# Altium PCB Resolver_PCB.PcbDoc (part 2 of 2)
Units mm, origin at the board's own origin, x right, y up, seen from the top; angles counter-clockwise.
Board outline 113.4 x 54.46 mm, 2 copper layers (Top Layer, Bottom Layer); 126 components, 86 nets, 363 pads, 149 vias.
Unrouted connection lines stored in the file: 1.
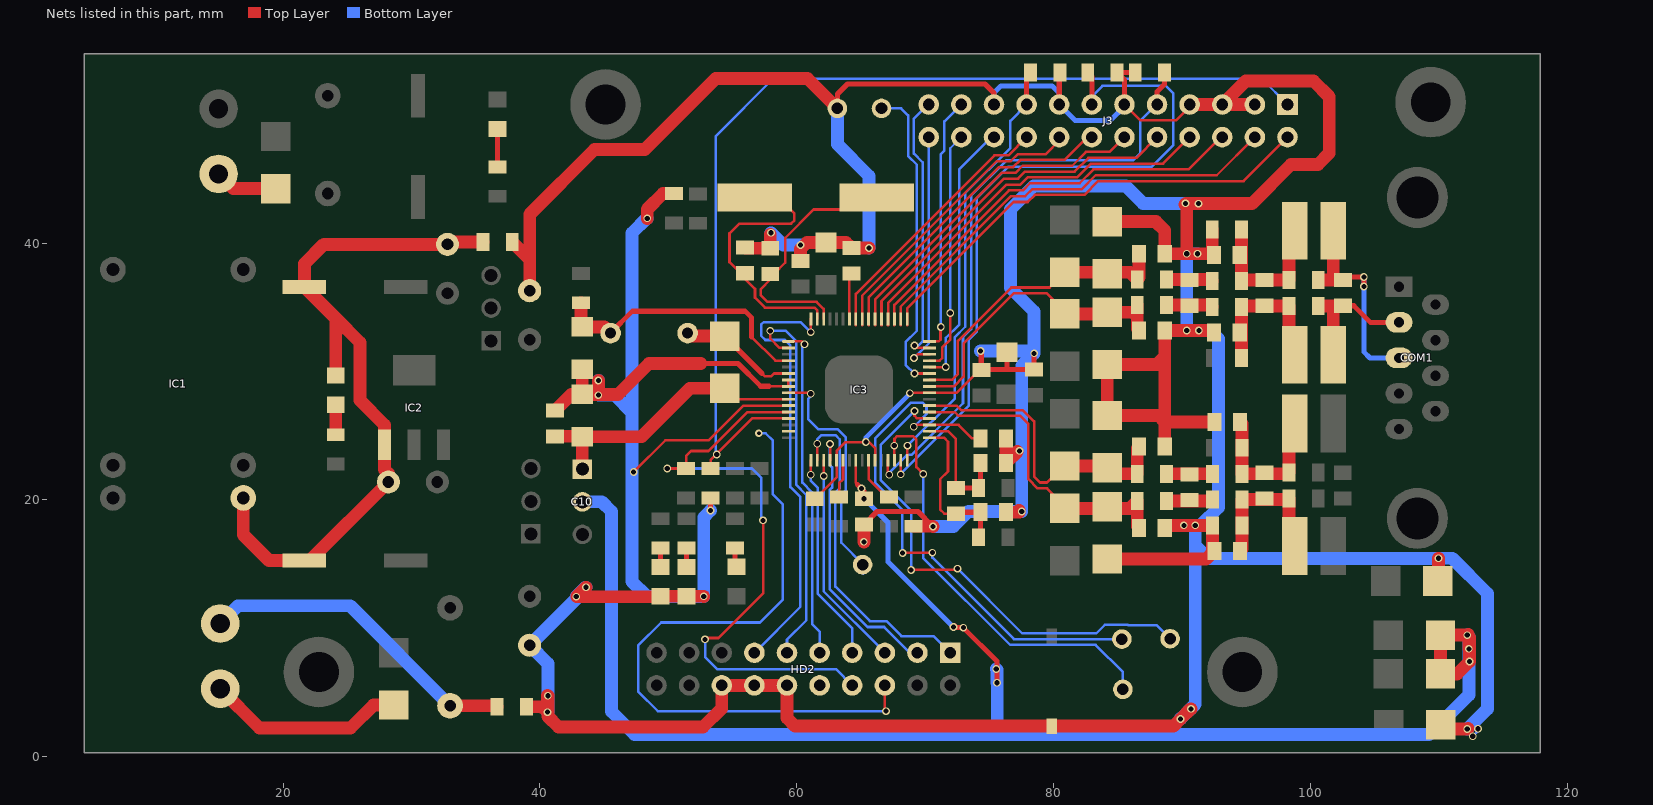
[diagram p2: the nets of this part, all layers, seen from the top]

## Via types
v1: diameter 0.6, hole 0.4, Top Layer to Bottom Layer, 106 vias
v2: diameter 0.4, hole 0.4, Top Layer to Bottom Layer, 32 vias
v3: diameter 0.6, hole 0.6, Top Layer to Bottom Layer, 9 vias
v4: diameter 0.6, hole 0.3, Top Layer to Bottom Layer, 2 vias

## Nets (pads, with @x,y where several pads share a name; then routed paths per layer and width w, separated by ;. In a path a pad name is that pad's centre, name@x,y a point inside that pad or via, vN(x,y) a via of type N, cw(c..) or ccw(c..) an arc to the next point about the centre after c; other vN are vias at no path point) (continued)
GND_DSP: C8.1 C9.1 Cx1.1 Cx2.1 Cx3.1 Cx4.1 Cx5.1 Cx6.1 Cx7.1 Cx8.2 Cx9.1 Cx10.1 Cx12.2 Cx13.1 Cx14.1 Cx15.1 Cx16.1 Cx20.1 Cx21.1 Cx22.2 Cx23.1 Cx24.1 Cx25.1 Cx29.1 Cx30.1 Cx31.2 DIO3.1 DIO4.1 DIO7.1 DIO8.1 DIO11.1 DIO12.1 HD2.12 HD2.14 HD2.16 IC3.7 IC3.8 IC3.11 IC3.21 IC3.27 IC3.40 J3.3 J3.5 J3.7 J3.11 J3.15 J3.19 LED3.2 LED4.2 R3.2 R4.2 R24.2 R25.2 R26.2 R27.2 R28.2 R29.2 R30.2 R38.2 SW1.2 TP2.1 | length 546.9
  Top Layer w0.2: v1(47.295,22.174) 49.759,24.638 53.144,24.638 55.856,27.35 IC3.11@59.35,27.35 ; 57.836,28.854 57.84,28.85 IC3.8@59.35,28.85 IC3.7@59.35,29.35 IC3.7@59.337,29.337 ; Cx1.1@61.4,20.1 61.444,20.1 63.1,21.756 IC3.21@63.1,22.6 ; IC3.21@63.1,23.1 63.1,23.832 63.779,24.511 v1(65.38,24.511) 65.634,24.511 66.1,24.045 IC3.27@66.1,23.1 ; v1(68.809,28.321) 68.838,28.35 IC3.40@70.35,28.35 72.444,28.35 74.228,30.134 Cx4.1@74.371,30.134 ; J3.11@85.52,50.8 86.739,49.581 89.56,49.581 90.6,50.62 J3.7@90.6,50.8
  Top Layer w0.4: 52.527,30.632 55.423,30.632 57.201,28.854 57.836,28.854 ; v1(53.289,19.176) R28.2@53.289,20.155 ; Cx23.1@55.982,39.659 Cx23.1@56.033,39.608 ; v1@57.938,40.767 v1(57.988,40.818) ; 60.3,39.548 v1(60.3,39.853) ; TP2.1@63.17,50.495 63.17,51.613 63.957,52.4 74.651,52.4 75.36,51.691 J3.19@75.36,50.8 ; Cx8.2@64.119,39.776 Cx8.2@64.262,39.634 ; v1(65.227,16.739) 65.227,18.078 Cx9.1@65.25,18.1 66.25,19.101 69.444,19.101 v1@70.587,17.957 ; v1@65.624,39.634 v1(65.634,39.624) ; v1(74.32,31.598) 74.371,31.547 Cx4.1@74.371,30.134 74.393,30.155 76.276,30.155 ; Cx3.1@76.378,31.521 76.378,30.257 76.276,30.155 ; v1@77.318,23.8 v1(77.343,23.825) ; v1@77.471,19.051 v1(77.521,19.101) ; v1(78.486,31.42) 78.488,31.418 Cx2.1@78.488,30.155 76.276,30.155 ; J3.15@80.44,50.8 80.44,53.24 R26.2@80.5,53.3 ; J3.11@85.52,50.8 85.52,52.723 R27.2@84.943,53.3 R29.2@86.357,53.3
  Top Layer w1: R3.2@37.843,40.1 39.2,38.743 ; R4.2@38.943,3.9 40.169,3.9 v1(40.589,3.48) v1@40.589,4.775 ; C9.1@39.2,36.3 39.2,38.743 ; v1(40.615,4.75) 40.615,3.15 41.453,2.311 52.705,2.311 54.16,3.766 HD2.16@54.16,5.56 HD2.14@56.7,5.56 HD2.12@59.24,5.56 59.24,3.015 59.868,2.388 SW1.2@79.852,2.388 ; Cx6.1@41.174,26.959 42.44,28.226 Cx7.1@43.3,28.226 ; Cx5.1@43.3,30.174 Cx7.1@43.3,28.226 ; v1(43.586,13.208) 42.871,12.493 42.897,12.467 49.367,12.467 LED3.2@49.4,12.5 LED4.2@51.4,12.5 52.753,12.5 v1(52.756,12.497) ; v1(44.552,29.312) 44.552,28.251 v1@44.526,28.226 ; v1(48.362,41.935) 48.362,42.647 49.581,43.866 R30.2@50.444,43.866 ; 52.527,30.632 48.489,30.632 46.082,28.226 v1@44.526,28.226 ; Cx23.1@56.033,39.608 Cx24.1@57.938,39.608 v1@57.938,40.675 ; Cx14.1@60.3,38.624 60.3,39.548 60.808,40.056 Cx13.1@62.281,40.056 63.84,40.056 Cx8.2@64.119,39.776 ; TP2.1@63.17,50.495 60.833,52.832 53.696,52.832 48.16,47.296 44.248,47.296 39.2,42.248 39.2,38.743 ; Cx8.2@64.262,39.634 64.271,39.624 v1(65.634,39.624) ; v1(65.227,16.739) 65.25,16.761 Cx9.1@65.25,18.1 ; R24.2@69.1,17.957 70.587,17.957 v1(70.612,17.932) ; Cx12.2@76.3,19.051 77.321,19.051 v1@77.321,19.2 ; Cx16.1@76.3,24.8 Cx10.1@76.3,22.875 77.178,23.753 v1@77.178,23.8 ; SW1.2@79.858,2.393 SW1.2@79.852,2.388 ; DIO7.1@84.182,15.409 91.885,15.409 Cx21.1@92.52,16.044 92.377,16.187 R25.2@92.377,18.025 v1(91.034,18.025) v1(90.145,18.025) 88.865,18.025 Cx20.1@88.662,17.822 ; DIO12.1@84.182,41.677 87.965,41.677 88.662,40.98 Cx30.1@88.662,39.177 v1(90.373,39.177) ; Cx22.2@88.662,24.172 88.662,26.095 ; J3.7@90.6,50.8 J3.5@93.14,50.8 ; v1(90.703,3.734) 90.678,3.734 v1(89.891,2.946) 89.332,2.388 SW1.2@79.852,2.388 ; R38.2@92.361,41.082 Cx29.1@92.361,39.239 ; Cx25.1@92.504,33.061 92.357,33.208 v1(91.313,33.208) v1(90.373,33.208) Cx31.2@88.662,33.208 88.662,31.182 ; Cx29.1@92.504,39.096 Cx29.1@92.423,39.177 ; Cx15.1@92.52,26.077 88.681,26.077 88.662,26.095 ; J3.3@95.68,50.8 J3.5@93.14,50.8 ; DIO4.1@109.931,13.691 109.982,13.741 v1(109.982,15.469) ; DIO3.1@110.084,2.159 v1(112.217,2.159) v1@112.268,2.21 ; Cx7.1@43.3,28.226 v1@44.526,28.226 ; 88.662,26.095 88.662,31.182 ; 88.662,26.095 88.173,26.585 DIO8.1@84.182,26.585 DIO11.1@84.182,30.557 88.037,30.557 88.662,31.182 ; v1(90.373,39.177) 90.373,42.875 90.246,43.002 90.322,43.078 v1(91.288,43.078) 95.453,43.078 98.501,46.126 100.584,46.126 101.473,47.015 101.473,51.41 100.254,52.629 94.969,52.629 J3.5@93.14,50.8 ; v1(90.373,39.177) v1(91.211,39.177) Cx29.1@92.299,39.177 ; Cx29.1@92.299,39.177 Cx29.1@92.361,39.239 ; Cx29.1@92.299,39.177 Cx29.1@92.423,39.177 ; Cx29.1@92.361,39.239 Cx29.1@92.423,39.177
  Bottom Layer w0.2: v1(112.217,2.159) 113.03,2.159 v1(113.055,2.184) 113.055,2.007 v1(112.649,1.6)
  Bottom Layer w0.4: v1(65.38,24.511) 65.38,24.848 68.809,28.277 v1(68.809,28.321) ; J3.19@75.36,50.8 75.36,51.713 75.9,52.253 79.883,52.253 80.44,51.696 J3.15@80.44,50.8 81.685,49.555 82.451,49.555 82.461,49.546 84.42,49.546 85.52,50.646 J3.11@85.52,50.8 ; v1(77.343,23.825) v1@77.521,23.647
  Bottom Layer w1: v1(40.589,3.48) 40.615,3.505 v1(40.615,4.75) 40.615,7.275 C8.1@39.2,8.69 42.824,12.314 v1(42.824,12.471) 43.561,13.208 v1(43.586,13.208) ; v1(44.552,29.312) v1(44.552,28.169) 45.796,28.169 47.168,26.797 ; v1(48.362,41.935) 48.311,41.935 47.168,40.792 47.168,26.797 ; v1(53.289,19.176) 52.756,18.644 v1(52.756,12.497) 48.311,12.497 47.168,13.64 47.168,26.797 ; v1(57.988,40.818) 58.953,39.853 v1(60.3,39.853) ; TP2.1@63.17,50.495 63.17,47.701 65.634,45.237 v1(65.634,39.624) ; v1@70.704,17.932 72.212,17.932 73.381,19.101 v1(77.521,19.101) 77.521,23.647 77.521,30.455 v1(78.486,31.42) ; v1(74.32,31.598) 78.308,31.598 v1(78.486,31.42) ; v1@89.891,2.981 89.925,2.981 91.034,4.089 91.034,16.434 ; v1(90.145,18.025) v1(91.034,18.025) ; v1(91.211,39.177) v1(90.373,39.177) v1(90.373,33.208) v1(91.313,33.208) 92.192,33.208 92.837,32.563 92.837,19.406 91.456,18.025 v1(91.034,18.025) ; v1(91.288,43.078) 91.262,43.104 v1(90.272,43.104) 86.97,43.104 85.623,44.45 78.461,44.45 76.657,42.647 76.657,36.5 78.486,34.671 v1(78.486,31.42) ; v1(112.217,2.159) 113.792,3.734 113.792,12.725 111.049,15.469 v1(109.982,15.469) 109.95,15.437 92.03,15.437 91.034,16.434 ; 91.034,16.434 v1(91.034,18.025)
GND_EXC_EXT: C7.1 HD3.1 R4.1 | length 25.4
  Top Layer w1: C7.1@33,3.98 36.577,3.98 R4.1@36.657,3.9
  Bottom Layer w1: HD3.1@15.1,10.38 16.48,11.76 25.22,11.76 C7.1@33,3.98
GND_ISO: C1.2 C2.1 C5.2 C6.1 IC1.9 IC2.1 LED2.2 R3.1 | length 56.3
  Top Layer w1: IC1.9@16.9,20.16 16.9,17.288 18.888,15.3 C5.2@21.65,15.3 22.1,15.3 C6.1@28.2,21.4 28.2,22.067 27.9,22.367 IC2.1@27.9,24.3 27.9,25.846 25.984,27.762 25.984,32.266 24.1,34.15 ; LED2.2@24.1,29.7 24.1,34.15 ; R3.1@35.557,40.1 32.99,40.1 C2.1@32.8,39.91 23.171,39.91 21.666,38.405 21.666,36.616 C1.2@21.65,36.6 24.1,34.15
IE1: Cx10.2 Cx11.2 IC3.34 R11.2 | length 9.9
  Top Layer w0.2: IC3.34@70.35,25.35 71.805,25.35 72.39,24.765 Cx11.2@72.39,20.93 ; R11.2@74.137,20.93 R11.2@74.157,20.95 R11.2@74.3,21.093
  Top Layer w0.4: Cx11.2@72.39,20.93 R11.2@74.137,20.93 ; R11.2@74.3,21.093 Cx10.2@74.3,22.875
IE2: Cx11.1 Cx12.1 IC3.33 R13.2 | length 12.6
  Top Layer w0.2: IC3.33@70.35,24.85 71.467,24.85 71.78,24.536 71.78,22.225 71.171,21.615 71.171,19.253 71.494,18.93 Cx11.1@72.39,18.93 ; R13.2@74.157,17.1 R13.2@74.3,17.243 ; Cx12.1@74.179,18.93 Cx12.1@74.3,19.051
  Top Layer w0.4: Cx11.1@72.39,18.93 72.511,19.051 Cx12.1@74.3,19.051 R13.2@74.3,17.243
INBH: IC3.13 J3.1 R28.1 | length 80.2
  Top Layer w0.2: R28.1@53.289,22.441 53.289,23.113 v1@53.721,23.546 ; v1(53.772,23.546) v1@53.721,23.546 ; IC3.13@59.35,26.35 56.525,26.35 v1@53.721,23.546
  Bottom Layer w0.2: v1(53.772,23.546) 53.696,23.622 53.696,48.336 58.166,52.807 96.213,52.807 J3.1@98.22,50.8
IZ1: Cx22.1 DIO5.1 DIO8.2 IC3.38 R17.2 | length 24.1
  Top Layer w0.2: IC3.38@70.35,27.35 72.447,27.35 72.796,27 77.597,27 78.486,26.111 78.486,21.819 78.943,21.361 79.477,21.361 80.763,22.648 DIO5.1@80.88,22.648
  Top Layer w1: DIO5.1@80.88,22.648 84.055,22.648 DIO8.2@84.182,22.521 84.665,22.038 R17.2@86.519,22.038 86.519,24.029 Cx22.1@86.662,24.172
IZ2: Cx31.1 DIO9.1 DIO11.2 IC3.41 R32.2 | length 23.7
  Top Layer w0.2: IC3.41@70.35,28.85 72.233,28.85 73,29.616 73,32.2 76.896,36.097 79.473,36.097 80.88,34.69 DIO9.1@80.88,34.494
  Top Layer w1: DIO9.1@80.88,34.494 84.055,34.494 DIO11.2@84.182,34.621 86.214,34.621 86.519,34.315 ; R32.2@86.519,35.18 86.519,34.315 ; Cx31.1@86.662,33.208 86.519,33.351 86.519,34.315
IZ3: Cx20.2 DIO6.1 DIO7.2 IC3.37 R21.2 | length 24.3
  Top Layer w0.2: IC3.37@70.35,26.85 72.305,26.85 72.608,26.546 77.409,26.546 78.032,25.923 78.032,21.631 78.755,20.907 79.499,20.907 80.88,19.526 DIO6.1@80.88,19.346
  Top Layer w1: DIO6.1@80.88,19.346 85.935,19.346 R21.2@86.519,19.93 86.519,17.964 Cx20.2@86.662,17.822
IZ4: Cx30.2 DIO10.1 DIO12.2 IC3.42 R35.2 | length 23.4
  Top Layer w0.2: IC3.42@70.35,29.35 72.091,29.35 72.546,29.804 72.546,32.388 76.708,36.551 79.691,36.551 DIO10.1@80.88,37.74
  Top Layer w1: DIO10.1@80.88,37.74 85.958,37.74 R35.2@86.519,37.179 86.662,37.321 Cx30.2@86.662,39.177
NC: HD2.10
NCS: HD2.7 IC3.17 | length 16.3
  Top Layer w0.2: v1(61.087,21.971) 61.1,21.984 IC3.17@61.1,23.1
  Bottom Layer w0.2: v1(61.087,21.971) 61.087,21.514 61.649,20.952 61.649,12.69 64.32,10.019 HD2.7@64.32,8.1
NetC10_1: C10.1 Cx6.2 Cx7.2 IC3.10 SS1.2 | length 22.6
  Top Layer w0.2: SS1.2@54.381,28.702 55.233,27.85 IC3.10@59.35,27.85
  Top Layer w1: Cx6.2@41.174,24.959 43.265,24.959 Cx7.2@43.3,24.924 ; C10.1@43.3,22.4 Cx7.2@43.3,24.924 ; SS1.2@54.381,28.702 51.689,28.702 47.911,24.924 Cx7.2@43.3,24.924
NetCx5_2: Cx5.2 IC3.4 L1.1 R8.2 | length 21.3
  Top Layer w0.2: 56.49,32.7 58.34,30.85 IC3.4@59.35,30.85
  Top Layer w0.4: L1.1@45.5,33 47.196,34.696 55.982,34.696 56.49,34.188 56.49,32.7
  Top Layer w1: R8.2@43.2,35.357 43.2,33.576 Cx5.2@43.3,33.476 45.024,33.476 L1.1@45.5,33
NetCx8_1: Cx8.1 IC3.58 | length 3.6
  Top Layer w0.2: IC3.58@64.1,34.1 64.1,37.472 Cx8.1@64.262,37.634
NetCx15_2: Cx15.2 Cx18.2 L2.1 R16.2 R18.1 R19.2 | length 11.8
  Top Layer w1: Cx15.2@94.52,26.077 94.663,25.934 R18.1@94.663,22.038 98.228,22.038 R19.2@98.33,22.14 98.33,25.494 L2.1@98.786,25.95
NetCx16_2: Cx16.2 IC3.35 TP1.1 | length 42.8
  Top Layer w0.2: v1(68.25,15.875) 70.536,15.875 v1(70.561,15.9) ; v1(69.113,25.705) 69.259,25.85 IC3.35@70.35,25.85 72.6,25.85 73.651,24.8 Cx16.2@74.3,24.8
  Bottom Layer w0.2: v1(68.25,15.875) 68.205,15.919 68.205,19.243 66.1,21.348 66.1,24.785 68.893,27.578 69.806,27.578 70.104,27.28 70.104,26.695 v1(69.113,25.705) ; v1(70.561,15.9) 70.561,15.519 76.911,9.169 TP1.1@85.319,9.169
NetCx17_1: Cx17.1 R21.1 R22.2 | length 3.6
  Top Layer w1: R21.1@88.805,19.93 92.275,19.93 R22.2@92.377,20.031
NetCx17_2: Cx17.2 R17.1 R18.2 | length 3.6
  Top Layer w1: R17.1@88.805,22.038 R18.2@92.377,22.038
NetCx18_1: Cx18.1 Cx21.2 L3.1 R22.1 R23.2 R25.1 | length 11.6
  Top Layer w1: Cx21.2@94.52,16.044 94.663,16.187 R25.1@94.663,18.025 R22.1@94.663,20.031 98.254,20.031 R23.2@98.33,20.108 98.33,16.88 L3.1@98.786,16.425
NetCx23_2: Cx23.2 IC3.63 X1.1 | length 21.6
  Top Layer w0.2: X1.1@56.743,43.561 58.572,43.561 59.817,42.316 59.817,41.783 59.563,41.529 55.524,41.529 54.762,40.767 54.762,38.532 55.636,37.659 Cx23.2@55.982,37.659 55.982,37.211 56.747,36.446 56.747,35.753 57.524,34.976 61.366,34.976 61.6,34.742 IC3.63@61.6,34.1
NetCx24_2: Cx24.2 IC3.62 X1.2 | length 20
  Top Layer w0.2: IC3.62@62.1,34.1 62.1,34.884 61.554,35.43 57.712,35.43 57.201,35.941 57.201,36.424 57.938,37.16 Cx24.2@57.938,37.608 58.233,37.608 59.106,38.481 59.106,40.411 61.316,42.621 63.424,42.621 64.364,43.561 X1.2@66.243,43.561
NetCx25_2: Cx25.2 Cx27.2 L4.1 R31.2 R33.1 R34.2 | length 11.7
  Top Layer w1: R31.2@94.647,31.049 R33.1@94.647,35.047 94.713,35.113 R34.2@98.33,35.113 98.33,31.774 L4.1@98.786,31.319
NetCx26_1: Cx26.1 R35.1 R36.2 | length 3.6
  Top Layer w1: R35.1@88.805,37.179 92.241,37.179 R36.2@92.361,37.058
NetCx26_2: Cx26.2 R32.1 R33.2 | length 3.6
  Top Layer w1: R32.1@88.805,35.18 92.227,35.18 R33.2@92.361,35.047
NetCx27_1: Cx27.1 Cx29.2 L5.1 R36.1 R37.2 R38.1 | length 11.8
  Top Layer w1: R38.1@94.647,41.082 R36.1@94.647,37.058 94.717,37.129 Cx27.1@96.425,37.129 98.314,37.129 R37.2@98.33,37.145 98.33,40.515 L5.1@98.786,40.971
NetD1_1: D1.1 HD1.2 | length 4.9
  Top Layer w1: HD1.2@14.975,45.393 16.118,44.25 D1.1@19.41,44.25
NetD2_1: D2.1 HD3.2 | length 15.5
  Top Layer w1: HD3.2@15.1,5.3 18.165,2.235 25.248,2.235 27.048,4.036 D2.1@28.6,4.036
NetIC3_6: IC3.6 L1.2 SS1.1 | length 9.3
  Top Layer w0.2: 57.297,29.85 57.506,29.642 58.024,29.642 58.232,29.85 IC3.6@59.35,29.85
  Top Layer w0.4: SS1.1@54.381,32.766 57.297,29.85
  Top Layer w1: L1.2@51.5,33 51.734,32.766 SS1.1@54.381,32.766
NetIC3_9: IC3.9 TP3.1 | length 18.8
  Top Layer w0.2: IC3.9@59.35,28.35 61.007,28.35 v1(61.087,28.27)
  Bottom Layer w0.2: v1(61.087,28.27) 61.087,28.064 60.887,27.864 60.887,26.311 61.7,25.498 63.205,25.498 63.802,24.902 63.802,20.734 63.465,20.398 63.465,16.672 65.176,14.961 TP3.1@65.176,14.275
NetIC3_30: IC3.30 TP4.1 | length 33.6
  Top Layer w0.2: v1(67.589,24.232) v1@67.6,24.221 ; IC3.30@67.6,23.1 v1@67.6,24.221 ; v1(69.85,22.022) 69.317,22.555 69.317,24.714 69.063,24.968 67.818,24.968 67.615,24.765 67.615,24.236 v1@67.6,24.221
  Bottom Layer w0.2: v1(69.85,22.022) 69.85,15.494 76.629,8.715 83.283,8.715 85.395,6.604 TP4.1@85.395,5.258
NetIC3_36: IC3.36 TP5.1 | length 39.1
  Top Layer w0.2: v1(68.91,14.554) 72.415,14.554 v1(72.517,14.656) ; v1(69.164,26.924) 69.164,26.568 69.374,26.359 70.341,26.359 IC3.36@70.35,26.35
  Bottom Layer w0.2: v1(68.91,14.554) 68.904,14.561 68.904,19.187 66.554,21.536 66.554,24.314 v1(69.164,26.924) ; v1(72.517,14.656) 77.549,9.623 83.337,9.623 83.999,10.285 85.781,10.285 85.805,10.262 88.011,10.262 TP5.1@89.078,9.195
NetIC3_43: IC3.43 TP6.1 | length 24.5
  Top Layer w0.2: v1(69.164,29.845) 69.169,29.85 IC3.43@70.35,29.85
  Bottom Layer w0.2: TP6.1@66.6,50.5 68.118,50.5 68.672,49.946 68.672,46.789 69.345,46.116 69.345,33.176 68.485,32.315 68.485,30.524 v1(69.164,29.845)
NetLED1_1: LED1.1 R1.1 | length 3
  Top Layer w0.4: R1.1@36.7,45.943 LED1.1@36.7,48.9
NetLED2_1: LED2.1 R2.1 | length 2.3
  Top Layer w1: R2.1@24.1,25.086 LED2.1@24.1,27.414
NetLED3_1: LED3.1 R5.1 | length 1.5
  Top Layer w0.4: LED3.1@49.4,14.786 R5.1@49.4,16.257
NetLED4_1: LED4.1 R6.1 | length 1.5
  Top Layer w0.4: LED4.1@51.4,14.786 R6.1@51.4,16.257
NetLED5_1: LED5.1 R7.1 | length 1.5
  Top Layer w0.4: R7.1@55.2,16.257 55.2,14.9 LED5.1@55.3,14.8
OE1: IC3.22 R9.2 | length 2.5
  Top Layer w0.2: R9.2@63.3,20.243 63.3,21.314 63.6,21.614 IC3.22@63.6,22.6
OE2: IC3.26 R10.2 | length 3.1
  Top Layer w0.2: IC3.26@65.6,22.6 65.6,21.624 66.981,20.243 R10.2@67.2,20.243
OMODE: IC3.29 J3.9 R29.1 | length 47.4
  Top Layer w0.2: IC3.29@67.1,23.1 67.1,22.079 v1(67.208,21.971)
  Top Layer w0.4: J3.9@88.06,50.8 88.06,51.789 88.643,52.372 R29.1@88.643,53.3
  Bottom Layer w0.2: v1(67.208,21.971) 67.208,22.149 68.58,23.52 68.936,23.52 72.949,27.534 72.949,32.676 73.577,33.304 73.577,43.7 76.331,46.453 86.179,46.453 86.766,47.041 86.766,49.555 88.011,50.8 J3.9@88.06,50.8
ORD0: IC3.57 J3.18 | length 20.8
  Top Layer w0.2: IC3.57@64.6,33.6 IC3.57@64.6,34.1 64.6,36.05 75.387,46.838 76.478,46.838 J3.18@77.9,48.26
ORD1: IC3.56 J3.16 | length 22.9
  Top Layer w0.2: IC3.56@65.1,33.6 IC3.56@65.1,34.1 65.1,35.908 75.575,46.384 76.666,46.384 77.221,46.939 79.4,46.939 80.44,47.979 J3.16@80.44,48.26
ORD2: IC3.55 J3.14 | length 24.7
  Top Layer w0.2: IC3.55@65.6,33.6 IC3.55@65.6,34.1 65.6,35.766 75.763,45.93 76.854,45.93 77.409,46.485 80.851,46.485 82.626,48.26 J3.14@82.98,48.26
ORD3: IC3.54 J3.12 | length 26.7
  Top Layer w0.2: IC3.54@66.1,33.6 IC3.54@66.1,34.1 66.1,35.624 75.951,45.476 77.042,45.476 77.597,46.031 81.454,46.031 82.529,47.106 84.366,47.106 J3.12@85.52,48.26
ORD4: IC3.53 J3.10 | length 28.6
  Top Layer w0.2: IC3.53@66.6,33.6 IC3.53@66.6,34.1 66.6,35.482 76.139,45.022 77.23,45.022 77.785,45.577 81.642,45.577 82.717,46.652 86.452,46.652 J3.10@88.06,48.26
ORD5: IC3.52 J3.8 | length 30.6
  Top Layer w0.2: IC3.52@67.1,33.6 67.136,33.636 67.136,35.376 76.327,44.568 77.418,44.568 77.973,45.123 81.83,45.123 82.905,46.198 88.538,46.198 J3.8@90.6,48.26
ORD6: IC3.51 J3.6 | length 32.5
  Top Layer w0.2: IC3.51@67.6,33.6 IC3.51@67.6,34.1 67.6,35.198 76.516,44.114 77.606,44.114 78.161,44.669 82.018,44.669 83.093,45.744 90.524,45.744 93.04,48.26 J3.6@93.14,48.26
ORD7: IC3.50 J3.4 | length 34.5
  Top Layer w0.2: IC3.50@68.1,33.6 IC3.50@68.1,34.1 68.1,35.056 76.704,43.66 77.794,43.66 78.349,44.215 82.206,44.215 83.281,45.29 92.71,45.29 J3.4@95.68,48.26
ORD8: IC3.49 J3.2 | length 36.5
  Top Layer w0.2: IC3.49@68.6,33.6 IC3.49@68.6,34.1 68.6,34.914 76.892,43.206 77.982,43.206 78.538,43.761 82.395,43.761 83.469,44.836 94.796,44.836 J3.2@98.22,48.26
ORD9: IC3.48 J3.21 | length 19.9
  Top Layer w0.2: IC3.48@70.35,32.35 71.06,32.35 71.196,32.487 71.196,33.452 v1(71.222,33.477)
  Bottom Layer w0.2: v1(71.222,33.477) 71.222,46.939 71.501,47.219 71.501,49.481 J3.21@72.82,50.8
ORD10: IC3.47 J3.23 | length 21.3
  Top Layer w0.2: v1(69.164,32.029) 69.164,31.925 69.239,31.85 IC3.47@70.35,31.85
  Bottom Layer w0.2: v1(69.164,32.029) 69.469,32.029 69.799,32.36 69.799,46.304 69.126,46.977 69.126,49.695 70.231,50.8 J3.23@70.28,50.8
ORD11: IC3.46 J3.24 | length 19
  Top Layer w0.2: v1(69.139,31.064) 69.425,31.35 IC3.46@70.35,31.35
  Bottom Layer w0.2: v1(69.139,31.064) 69.146,31.064 70.28,32.198 J3.24@70.28,48.26
ORD12: IC3.45 J3.22 | length 18.9
  Top Layer w0.2: IC3.45@70.35,30.85 71.134,30.85 71.323,31.039 71.323,31.877 71.958,32.512 v1(71.958,34.569)
  Bottom Layer w0.2: v1@71.955,34.569 71.955,47.395 J3.22@72.82,48.26
ORD13: IC3.44 J3.20 | length 20.8
  Top Layer w0.2: IC3.44@70.35,30.35 71.6,30.35 v1(71.603,30.353)
  Bottom Layer w0.2: v1(71.603,30.353) 71.603,32.614 72.669,33.68 72.669,45.771 75.159,48.26 J3.20@75.36,48.26
OUTA: HD2.9 IC3.1 | length 26
  Top Layer w0.2: IC3.1@59.35,32.35 60.385,32.35 v1(60.604,32.131)
  Bottom Layer w0.2: v1(60.604,32.131) 60.433,31.96 60.433,21.355 61.195,20.593 61.195,10.331 61.78,9.746 HD2.9@61.78,8.1
OUTB: HD2.11 IC3.2 | length 29.9
  Top Layer w0.2: v1(57.937,33.172) 57.937,32.563 58.65,31.85 IC3.2@59.35,31.85
  Bottom Layer w0.2: v1(57.937,33.172) 59.157,33.172 59.95,32.379 59.95,21.196 60.741,20.405 60.741,10.627 59.24,9.126 HD2.11@59.24,8.1
OUTZ: HD2.13 IC3.64 | length 34.5
  Top Layer w0.2: v1(61.087,33.071) 61.1,33.084 IC3.64@61.1,34.1
  Bottom Layer w0.2: HD2.13@56.7,8.1 60.287,11.687 60.287,20.217 59.496,21.007 59.496,32.045 59.08,32.461 57.556,32.461 57.226,32.791 57.226,33.655 57.429,33.858 60.3,33.858 v1(61.087,33.071)
PRD: HD2.6 IC3.15 | length 52.4
  Top Layer w0.2: v4@56.974,25.197 v4(57.048,25.197) ; HD2.6@66.86,5.56 66.86,3.65 v1(66.954,3.556)
  Bottom Layer w0.2: v4(57.048,25.197) 57.582,25.197 58.134,24.644 58.134,20.443 58.902,19.676 58.902,12.228 57.132,10.458 49.447,10.458 47.65,8.661 47.65,5.08 49.174,3.556 v1(66.954,3.556)
RESET_N: HD2.8 IC3.12 R12.1 | length 48.9
  Top Layer w0.2: v1(49.911,22.454) R12.1@51.388,22.454 ; v1(52.857,9.144) 52.967,9.254 53.907,9.254 57.379,12.725 v1(57.379,18.415) ; IC3.12@59.35,26.85 56.151,26.85 53.118,23.817 51.782,23.817 51.388,23.423 R12.1@51.388,22.454 ; R12.1@51.388,22.454 R12.1@51.388,22.441 51.676,22.441 51.664,22.454 R12.1@51.388,22.454
  Bottom Layer w0.2: v1(49.911,22.454) 56.515,22.454 57.226,21.742 57.226,18.567 v1(57.379,18.415) ; v1(52.857,9.144) 52.857,7.771 53.795,6.833 63.047,6.833 HD2.8@64.32,5.56
SCLK: HD2.1 IC3.18 | length 26.3
  Top Layer w0.2: v1(61.595,24.384) 61.6,24.379 IC3.18@61.6,23.1
  Bottom Layer w0.2: v1(61.595,24.384) 61.595,24.714 61.925,25.044 63.017,25.044 63.348,24.714 63.348,20.923 63.011,20.586 63.011,13.254 65.702,10.563 66.99,10.563 68.155,9.398 70.642,9.398 HD2.1@71.94,8.1
SDI: HD2.5 IC3.19 | length 17
  Top Layer w0.2: IC3.19@62.1,23.1 62.1,21.872 v1(62.103,21.869)
  Bottom Layer w0.2: v1(62.103,21.869) 62.103,12.878 66.86,8.121 HD2.5@66.86,8.1
SDO: HD2.3 IC3.20 | length 21.6
  Top Layer w0.2: v1(62.586,24.359) 62.6,24.344 IC3.20@62.6,23.1
  Bottom Layer w0.2: v1(62.586,24.359) 62.586,22.708 62.757,22.536 62.757,20.974 62.557,20.774 62.557,13.066 65.514,10.109 66.802,10.109 68.811,8.1 HD2.3@69.4,8.1
SIN+: COM1.2 Cx28.2 L4.2 R34.1 | length 10.7
  Top Layer w0.4: Cx28.2@102.546,35.129 103.378,35.129 104.67,33.836 COM1.2@106.911,33.836
  Top Layer w1: R34.1@100.616,35.113 101.625,35.113 ; L4.2@101.786,31.319 101.786,34.953 101.625,35.113 ; Cx28.2@102.546,35.129 102.53,35.113 101.625,35.113
SIN-: COM1.3 Cx28.1 L5.2 R37.1 | length 17
  Top Layer w0.4: Cx28.1@102.546,37.129 102.781,37.363 v1(104.165,37.363) v1@104.165,36.652
  Top Layer w1: R37.1@100.616,37.145 101.778,37.145 ; L5.2@101.786,40.971 101.786,37.153 101.778,37.145 ; Cx28.1@102.546,37.129 102.53,37.145 101.778,37.145
  Bottom Layer w0.4: v1(104.165,37.363) v1(104.165,36.627) 104.165,31.547 104.646,31.066 COM1.3@106.911,31.066
V_AMP: C10.2 Cx9.2 DIO1.2 DIO2.2 IC3.24 | length 131.3
  Top Layer w0.2: IC3.24@64.6,22.6 64.6,21.328 64.719,21.209
  Top Layer w0.4: 64.719,21.209 v1(65.037,20.892) 65.25,20.678 v1(65.25,20.1) ; v1@72.288,10.211 72.441,10.058 v1(72.974,10.058) 75.59,7.442 v1(75.59,5.766)
  Top Layer w1: v1@112.293,9.55 v1(112.217,9.474) ; v1(112.344,8.407) v1@112.344,9.347 ; v1(112.217,9.474) v1@112.344,9.347 ; v1(112.217,9.474) DIO2.2@110.134,9.474 DIO1.2@110.134,6.452 111.43,6.452 v1(112.395,7.417) 112.395,9.296 v1@112.344,9.347
  Bottom Layer w0.4: v1(65.037,20.892) 65.037,20.313 v1(65.25,20.1) 67.107,18.243 67.107,15.189 72.187,10.109 v1(72.212,10.109) 72.263,10.058 v1(72.974,10.058) ; 75.616,1.727 75.616,2.159
  Bottom Layer w1: C10.2@43.3,19.86 44.808,19.86 45.568,19.101 45.568,3.531 47.371,1.727 75.616,1.727 109.245,1.727 112.344,4.826 v1@112.344,7.468 ; v1(75.54,6.833) 75.59,6.782 v1(75.59,5.766) 75.616,5.74 75.616,2.159 ; v1(112.217,9.474) 112.344,9.347 v1(112.344,8.407) v1@112.344,7.468 ; v1(112.395,7.417) v1@112.344,7.468
VA0: IC3.31 J3.13 R27.1 | length 57.4
  Top Layer w0.2: IC3.31@68.097,23.067 v1(68.097,21.996) 68.1,21.999 IC3.31@68.1,23.1 ; R27.1@82.657,53.3 R27.1@82.98,52.977
  Top Layer w0.4: J3.13@82.98,50.8 R27.1@82.98,52.977
  Bottom Layer w0.2: v1(68.097,21.996) 68.097,22.04 73.403,27.346 73.403,32.488 74.031,33.116 74.031,43.512 76.468,45.949 87.63,45.949 89.306,47.625 89.306,51.689 88.748,52.248 83.795,52.248 82.98,51.433 J3.13@82.98,50.8
VA1: IC3.32 J3.17 R26.1 | length 34.2
  Top Layer w0.2: IC3.32@68.6,23.1 68.6,24.201 v1(68.631,24.232) ; R26.1@77.9,52.986 R26.1@78.214,53.3
  Top Layer w0.4: J3.17@77.9,50.8 R26.1@77.9,52.986
  Bottom Layer w0.2: v1(68.631,24.232) 72.314,27.915 72.314,32.683 73.123,33.492 73.123,43.888 76.632,47.396 76.632,49.532 J3.17@77.9,50.8
pads on no net: COM1.7 COM1.8 COM1.9 COM1.10 COM1.11 IC1.7 IC1.8 IC3. IC3.23 IC3.25 IC3.59 VIT1.1 VIT2.1 VIT3.1 VIT4.1
copper on no net:
  other v2: 22.784,4.572 94.7,4.572 21.26,5.334 24.308,5.334 93.176,5.334 96.224,5.334 20.752,6.604 24.816,6.604 92.668,6.604 96.732,6.604 21.26,7.874 24.308,7.874 93.176,7.874 96.224,7.874 22.784,8.636 94.7,8.636 45.11,48.768 109.372,48.946 43.586,49.53 46.634,49.53 107.848,49.708 110.896,49.708 43.078,50.8 47.142,50.8 107.34,50.978 111.404,50.978 43.586,52.07 46.634,52.07 107.848,52.248 110.896,52.248 45.11,52.832 109.372,53.01
  other v3: 63.58,27.203 64.85,27.203 66.12,27.203 63.58,28.6 64.85,28.6 66.12,28.6 63.58,29.997 64.85,29.997 66.12,29.997

## Polygon pours and split planes (outlines as drawn)
GND_24V_EXT on Top Layer "GND_24V_EXT_L01_P122" (solid, remove dead copper, pour order 122): 37.363,50.622 37.363,53.696 36.652,54.407 10.439,54.407 8.966,52.934 8.966,42.875 5.512,39.421 5.512,36.601 6.756,35.357 10.338,35.357 12.294,37.313 12.294,46.634 16.281,50.622 27.813,50.622 28.931,49.505 32.334,49.505 33.452,50.622
GND_ISO on Top Layer "GND_ISO_L01_P120" (solid, remove dead copper, pour order 120): 36.144,39.395 36.144,40.665 35.204,41.605 32.029,41.605 31.115,40.691 21.336,40.691 18.796,38.151 18.796,31.902 21.641,29.058 25.044,29.058 25.425,28.677 25.425,26.416 26.137,25.705 26.137,22.377 24.892,21.133 16.434,21.133 15.951,20.65 15.951,17.196 18.364,14.783 23.292,14.783 29.337,20.828 29.337,21.768 28.55,22.555 28.55,26.34 27.102,27.788 27.102,33.147 25.552,34.696 25.552,36.982 26.695,38.125 34.087,38.125 35.204,39.243 36.068,39.243
GND_DSP on Top Layer "GND_DSP_L01_P118" (solid, remove dead copper, pour order 118): 38.659,35.484 37.998,36.144 37.998,53.543 39.065,54.61 80.924,54.61 81.432,54.102 81.432,51.079 80.289,49.936 74.752,49.936 74.32,50.368 74.32,51.13 73.66,51.791 65.862,51.791 63.17,49.098 59.538,49.098 56.794,51.841 56.769,51.816 54.127,51.816 53.492,51.181 53.492,50.165 49.911,46.584 45.187,46.584 40.284,41.681 40.284,36.195 40.259,36.195 39.649,35.585
GND_DSP on Top Layer "GND_DSP_L01_P116" (solid, remove dead copper, pour order 116): 83.033,16.612 87.376,16.612 88.087,17.323 88.087,18.517 88.265,18.694 92.761,18.694 93.04,18.415 93.04,15.596 92.329,14.884 83.668,14.884 83.261,15.291
GND_DSP on Top Layer "GND_DSP_L01_P114" (solid, remove dead copper, pour order 114): 84.353,50.521 85.395,49.479 95.987,49.479 98.095,51.587 99.797,51.587 100.559,50.825 100.559,48.895 95.733,44.069 84.379,44.069 83.16,42.85 83.16,41.58 83.922,40.818 87.833,40.818 88.265,40.386 88.265,38.76 92.532,38.76 92.862,39.091 92.862,42.215 93.294,42.647 96.368,42.647 98.425,44.704 101.981,44.704 103.175,45.898 103.175,52.045 100.66,54.559 84.633,54.559 84.353,54.28
GND_DSP on Top Layer "GND_DSP_L01_P112" (solid, remove dead copper, pour order 112): 73.635,30.505 73.635,31.826 74.549,32.741 78.689,32.741 79.146,32.283 79.146,30.556 78.308,29.718 74.32,29.718
GND_DSP on Top Layer "GND_DSP_L01_P110" (solid, remove dead copper, pour order 110): 82.982,25.654 88.163,25.654 88.163,23.368 90.5,23.368 90.5,25.476 93.015,25.476 93.015,33.858 88.113,33.858 88.113,31.674 82.982,31.674
GND_DSP on Top Layer "GND_DSP_L01_P108" (solid, remove dead copper, pour order 108): 42.266,12.421 44.094,10.592 52.578,10.592 53.391,11.405 53.391,13.056 52.857,13.589 43.205,13.589 42.266,12.649
GND_DSP on Top Layer "GND_DSP_L01_P092" (solid, remove dead copper, pour order 92): 38.176,3.048 40.411,0.813 113.259,0.813 114.046,1.6 114.046,3.023 113.411,3.658 103.327,3.658 96.444,10.541 90.449,10.541 89.687,9.779 89.687,4.75 89.129,4.191 61.29,4.191 59.131,6.35 54.153,6.35 53.34,5.537 53.34,4.648 52.07,3.378 52.045,3.404 44.069,3.404 41.834,5.639 41.834,9.22 40.869,10.185 38.684,10.185 38.176,9.677
GND_DSP on Top Layer "GND_DSP_L01_P056" (solid, pour order 56): 35.4,9.4
5V_VCC on Top Layer "5V_VCC_L01_P048" (solid, pour order 48): 72.2,28.8
EXC_EXT on Top Layer "EXC_EXT_L01_P042" (solid, pour order 42): 32.4,3.3
EXC_EXT on Top Layer "EXC_EXT_L01_P040" (solid, pour order 40): 32.4,3.3
EXC_EXT on Top Layer "EXC_EXT_L01_P038" (solid, pour order 38): 32,8.5
GND_ISO on Top Layer "GND_ISO_L01_P028" (solid, pour order 28): 41.6,45.4
GND_ISO on Top Layer "GND_ISO_L01_P026" (solid, pour order 26): 41.6,45.3
GND_ISO on Top Layer "GND_ISO_L01_P024" (solid, pour order 24): 41.7,44.8
GND_ISO on Top Layer "GND_ISO_L01_P020" (solid, pour order 20): 28.1,16.8
GND_ISO on Top Layer "GND_ISO_L01_P018" (solid, pour order 18): 27.2,16.8
GND_DSP on Top Layer "GND_DSP_L01_P012" (solid, pour order 12): 12.93,45.77
GND_DSP on Top Layer "GND_DSP_L01_P006" (solid, pour order 6): 54.3,29
GND_DSP on Top Layer "GND_DSP_L01_P004" (solid, pour order 4): 53.1,29.1
no net on Top Layer "NONET_L01_P002" (solid, pour order 2): 54,29
no net on Top Layer "NONET_L01_P000" (solid, pour order 0): 53.1,29.1
GND_EXC_EXT on Bottom Layer "GND_EXC_EXT_L02_P124" (solid, remove dead copper, pour order 124): 12.522,9.373 12.522,13.462 13.716,14.656 26.391,14.656 34.544,6.502 34.544,2.54 33.63,1.626 13.995,1.626 12.573,3.048
GND_DSP on Bottom Layer "GND_DSP_L02_P106" (solid, remove dead copper, pour order 106): 64.719,24.46
GND_DSP on Bottom Layer "GND_DSP_L02_P104" (solid, remove dead copper, pour order 104): 67.158,39.04 68.783,40.665 68.783,45.364 65.024,49.124 65.024,51.714 64.313,52.426 59.08,52.426 55.093,48.438 55.093,39.014 56.312,37.795 61.239,37.795 61.773,38.329 61.773,40.945 61.011,41.707 57.226,41.707 56.21,42.723 56.21,47.422 56.744,47.955 61.874,47.955 63.957,45.872 63.957,39.954 64.872,39.04
GND_DSP on Bottom Layer "GND_DSP_L02_P102" (solid, remove dead copper, pour order 102): 51.46,20.193 51.46,14.681 50.648,13.868 48.463,13.868 47.803,14.529 47.803,40.31 49.606,42.113 49.606,42.57 49.378,42.799 47.955,42.799 46.507,41.351 46.507,31.039 45.745,30.277 44.094,30.277 43.434,29.616 43.332,29.616 43.332,27.661 46.253,24.74 46.253,12.827 47.244,11.836 52.908,11.836 53.492,12.421 53.492,13.233 53.975,13.716 56.591,13.716 57.15,14.275 57.15,16.815 56.515,17.45 56.515,20.472 55.931,21.057 52.324,21.057
GND_DSP on Bottom Layer "GND_DSP_L02_P100" (solid, remove dead copper, pour order 100): 44.298,14.173 43.459,14.173 38.125,8.839 38.125,3.073 40.386,0.813 42.723,0.813 43.866,1.956 43.866,11.43 44.729,12.294 44.729,13.741
GND_DSP on Bottom Layer "GND_DSP_L02_P098" (solid, remove dead copper, pour order 98): 38.557,10.16
GND_DSP on Bottom Layer "GND_DSP_L02_P096" (solid, remove dead copper, pour order 96): 65.024,39.014
GND_DSP on Bottom Layer "GND_DSP_L02_P094" (solid, remove dead copper, pour order 94): 70.129,19.025 73.812,22.708 73.812,31.902 74.549,32.639 74.549,42.647 77.165,45.263 91.592,45.263 92.177,44.679 92.177,42.901 91.415,42.139 80.797,42.139 79.832,43.104 78.283,43.104 78.003,42.824 78.003,38.989 79.705,37.287 79.705,20.015 77.013,17.323 77.013,12.344 78.13,11.227 80.137,11.227 82.321,13.411 82.321,17.348 84.328,19.355 89.992,19.355 92.05,21.412 92.05,31.521 91.262,32.309 89.586,32.309 89.51,32.233 87.452,34.29 87.452,39.7 88.316,40.564 93.167,40.564 95.098,38.633 95.098,18.999 96.545,17.551 114.275,17.551 116.738,15.088 116.738,3.734 114.249,1.245 111.76,1.245 111.049,1.956 111.049,2.337 113.03,4.318 113.03,10.77 111.658,12.141 93.802,12.141 92.634,10.973 92.634,3.607 91.491,2.464 88.341,2.464 87.579,3.226 87.579,5.613 90.094,8.128 90.094,10.338 89.941,10.338 89.23,11.049 83.769,11.049 82.728,10.008 77.648,10.008 70.129,17.526
GND_DSP on Bottom Layer "GND_DSP_L02_P090" (solid, pour order 90): 74.803,52.832
GND_DSP on Bottom Layer "GND_DSP_L02_P046" (solid, pour order 46): 72.2,29.3

## Keep-outs
Keep-Out Layer:
  the board outline again, w0.2

## Other copper
Top Layer:
  pour cut-out: 104.369,4.013 104.369,0.965 107.772,0.965 107.772,4.039

## Silkscreen, mask and mechanical layers (free items; w line width, h text height)
Top Overlay:
  lines w0.254: 34.696,20.447 34.696,21.742 ; 34.722,17.653 34.722,18.948 ; 34.773,19.462 35.712,20.148 37.287,20.122 ; 98.4,3.15 98.4,13.106 104.496,13.106 104.496,3.15 98.4,3.15
  text "GND" at 18.618,54 h2 r270
  text "Led24V" at 38.354,51.765 h1.2 r270
  text "1" at 100.432,50.47 h2
  text "2" at 100.33,47.498 h2
  text "OSIN" at 64.338,47.142 h2
  text "GND" at 60.096,47.117 h2
  text "+" at 19.99,40.513 h4
  text "3" at 34.087,37.135 h1.2
  text "2" at 34.087,34.569 h1.2
  text "1" at 34.087,31.902 h1.5
  text "1-2: 3v3 DSP / 3-2: 3v3 ISO" at 34.442,28.448 h1.2
  text "V_BOOST" at 44.831,22.479 h1
  text "5v ISO" at 34.138,21.946 h1.2
  text "V_AMP" at 44.933,19.533 h1
  text "EXC_EXT" at 44.679,16.84 h1
  text "5v DSP" at 33.833,16.688 h1.2
  text "Fault" at 56.591,14.732 h1 r270
  text "3.3v" at 52.857,14.707 h1.2 r270
  text "5v" at 47.346,14.224 h1.2 r270
  text "GND" at 18.364,13.132 h2 r270
  text "ORS" at 63.297,11.811 h2
  text "FaultRST" at 82.245,8.814 h1.5 r270
  text "COMAFE" at 83.566,6.858 h1
  text "OCOS" at 87.884,6.858 h1
  text "1  EXC+ / 2  SIN+ / 3  SIN- / 4  COS+ / 5  COS- / 6  EXC- / 7,8,9  NC" at 98.654,3.988 h1.5
  text "AOUT" at 84.099,2.718 h1
  text "+" at 18.263,0.559 h5
  text "EXC_EXT" at 8.204,0.508 h2

## Text inside footprints (layer, text, board x,y; h text height)
COM1: Top Overlay "1" at 103.962,38.227 h1.02 r270; Top Overlay "5" at 104.1,25.7 h1.02 r270; Top Overlay "9" at 111.633,27.129 h1.02 r270; Top Overlay "6" at 111.633,35.511 h1.02 r270; Top Overlay "FMALE" at 115.57,34.876 h1.52 r270